# Altium PCB PCB.PcbDoc
Units mil, origin at the board's own origin, x right, y up, seen from the top; angles counter-clockwise.
Board outline 1500.03 x 1150.03 mil, 2 copper layers (Top Layer, Bottom Layer); 57 components, 37 nets, 196 pads, 38 vias.
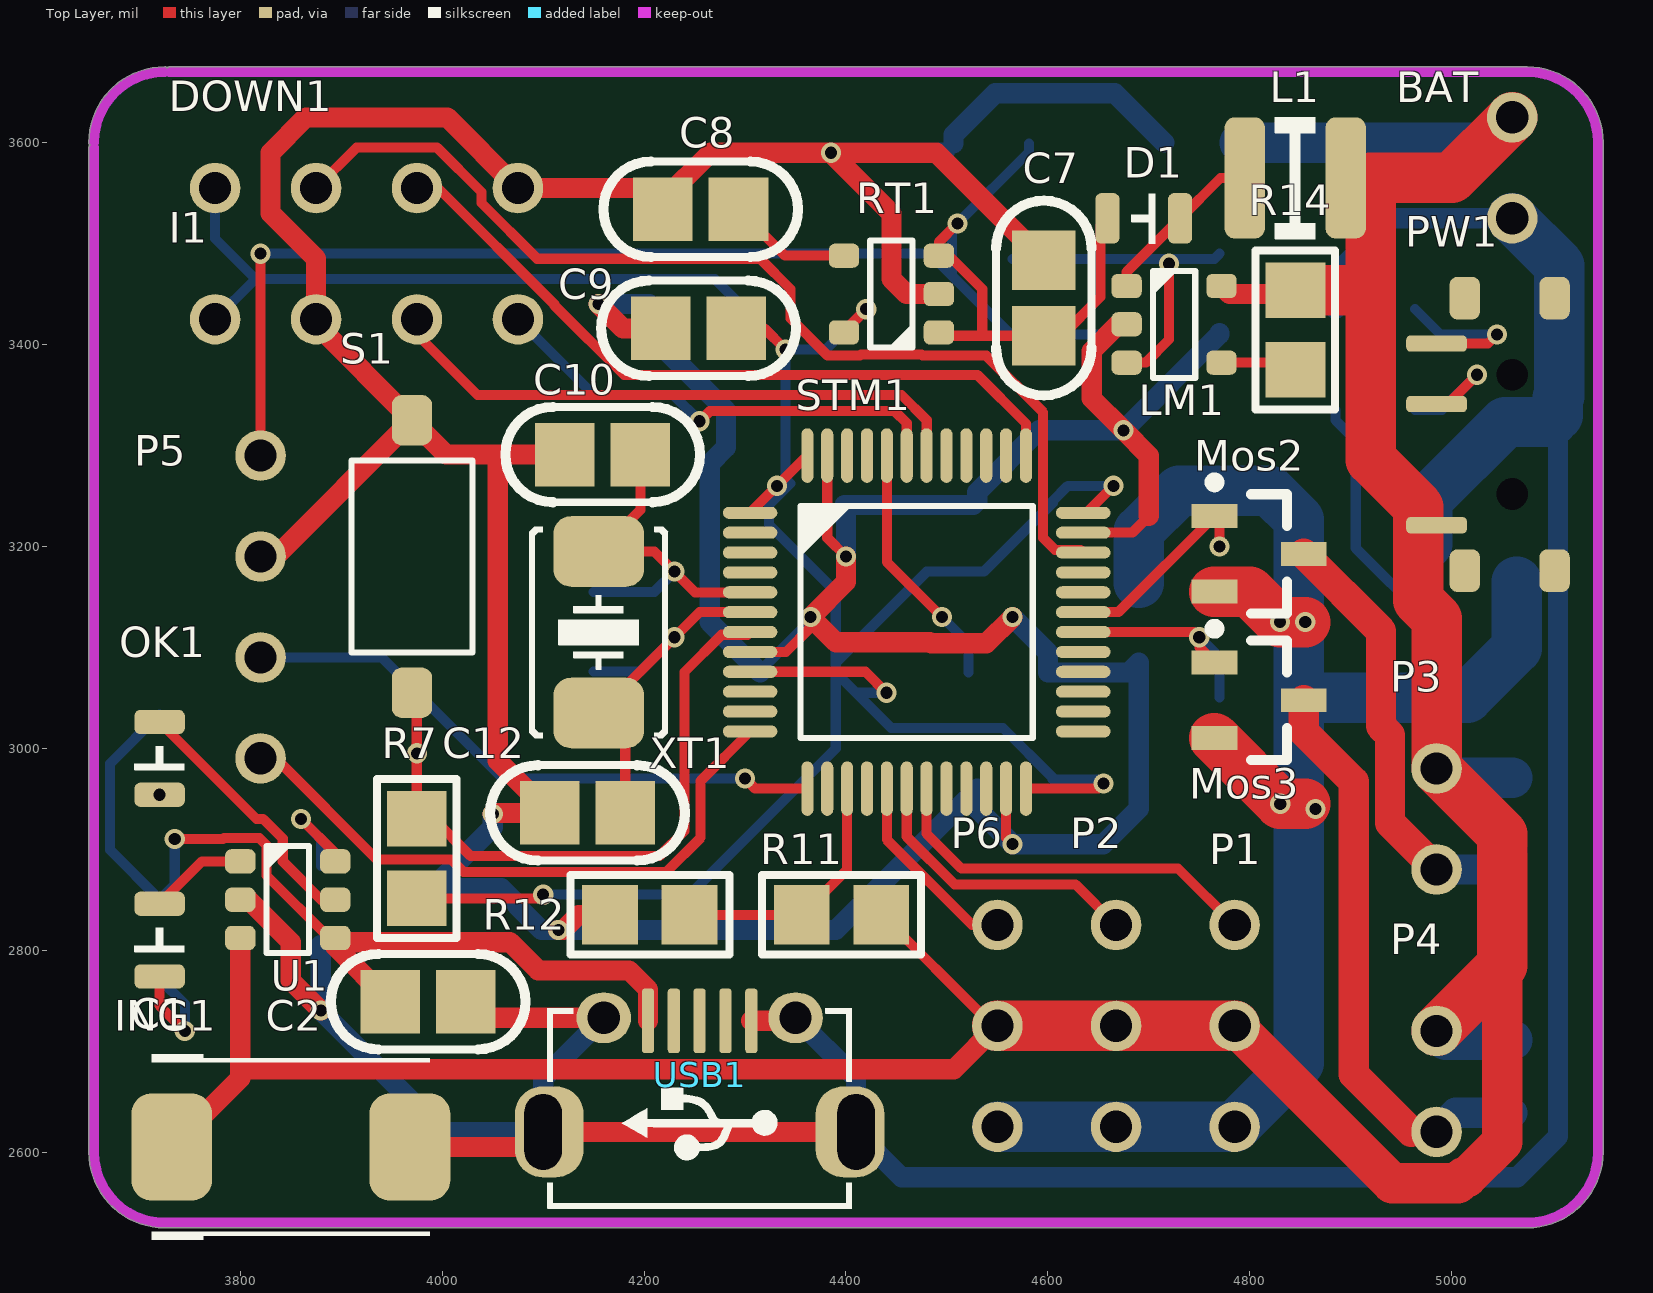
[diagram p0: Top Layer view]
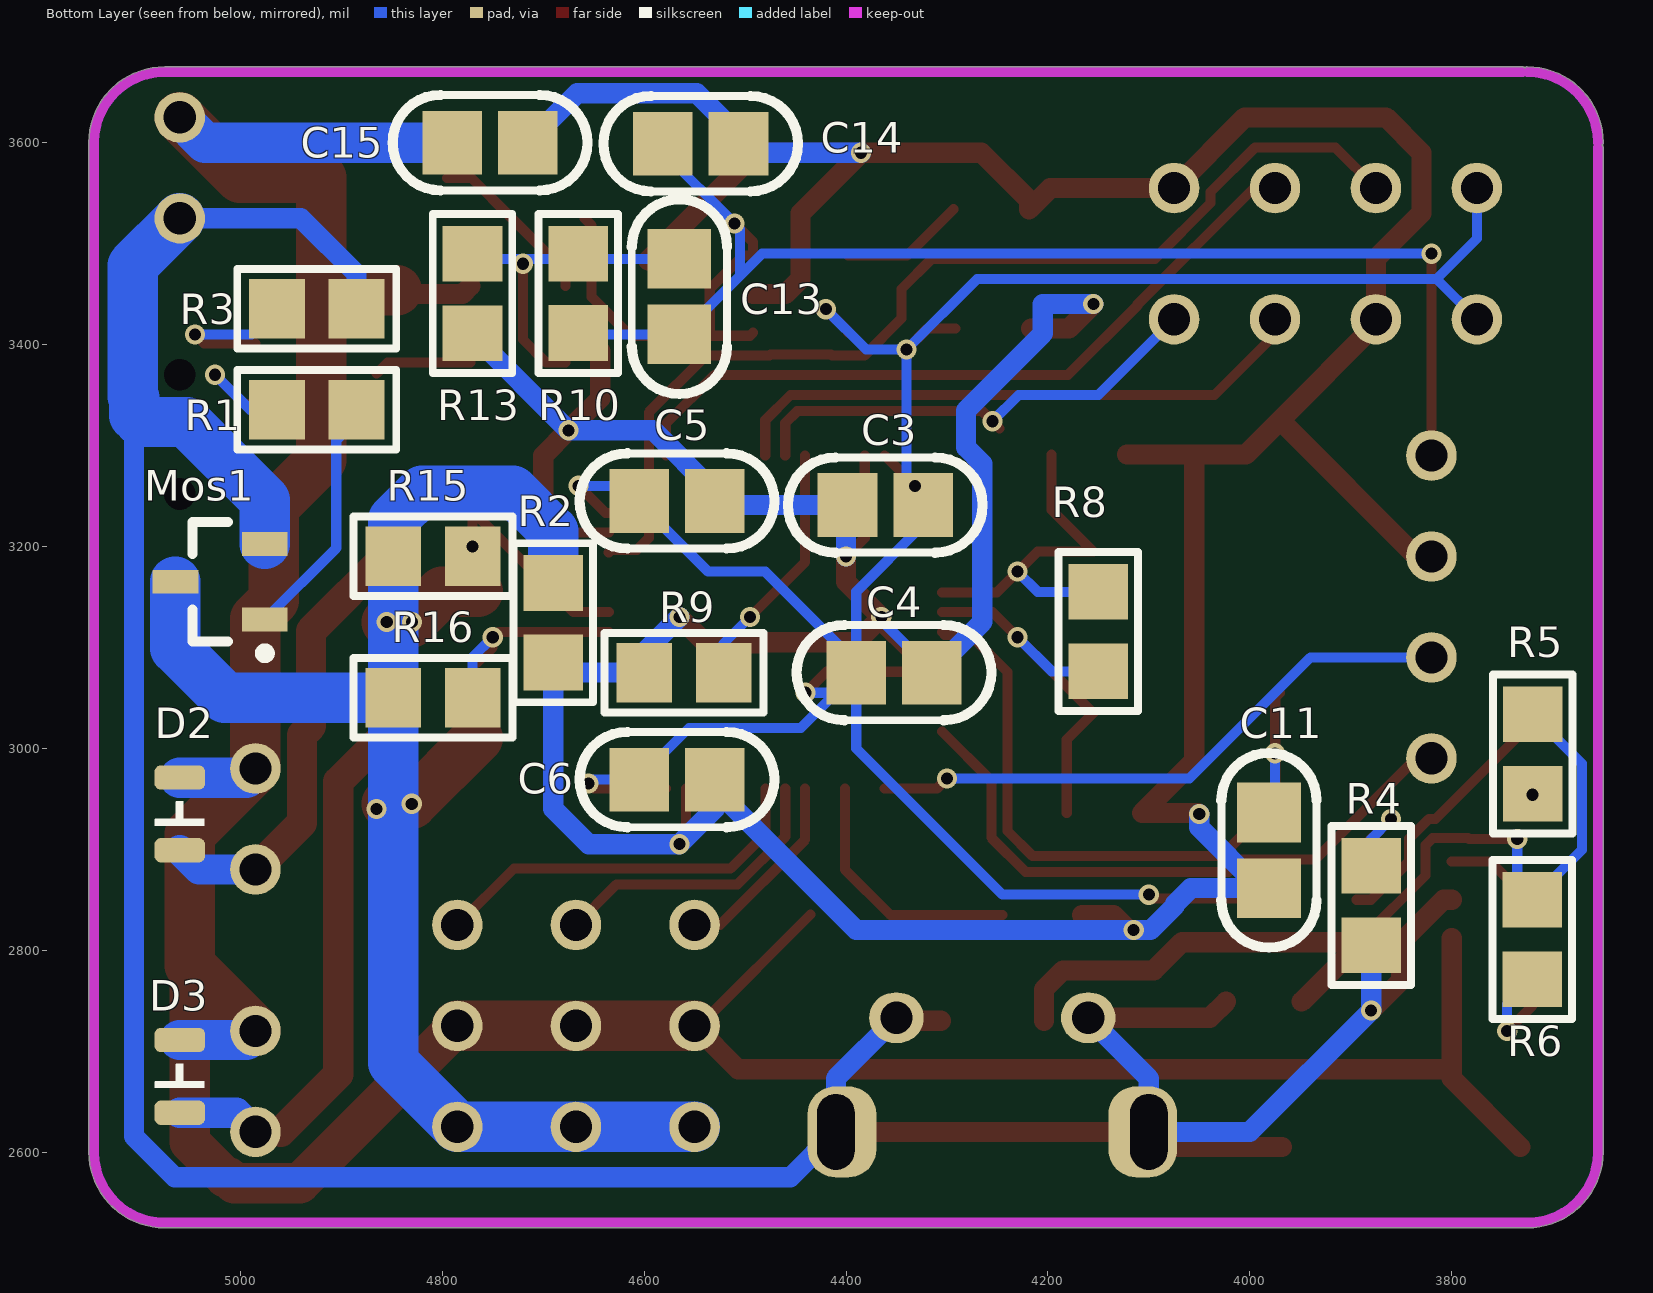
[diagram p1: Bottom Layer view, seen from below]
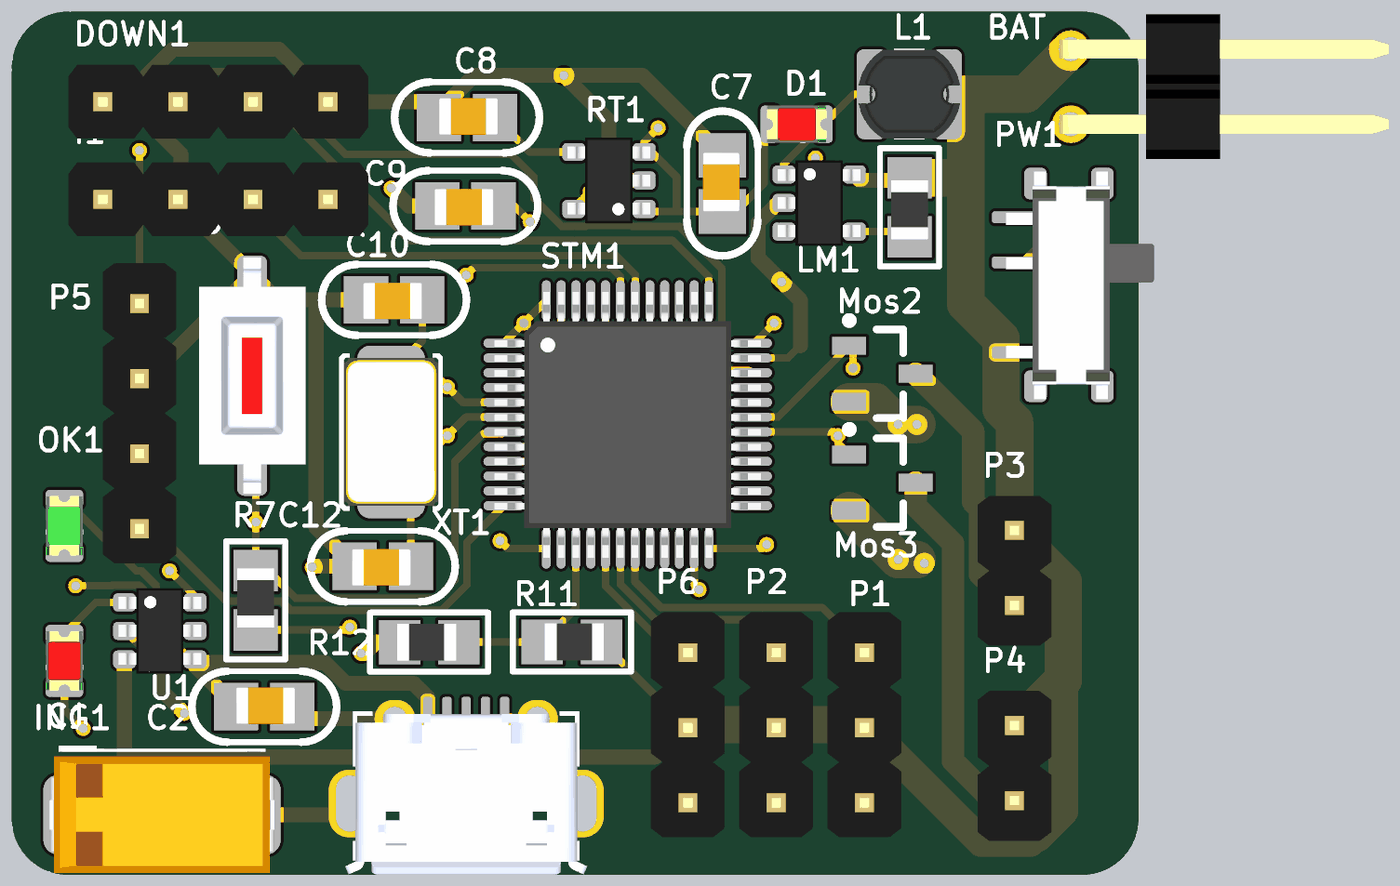
[diagram p2: 3D render of the assembled board from above, using the file's embedded part models]
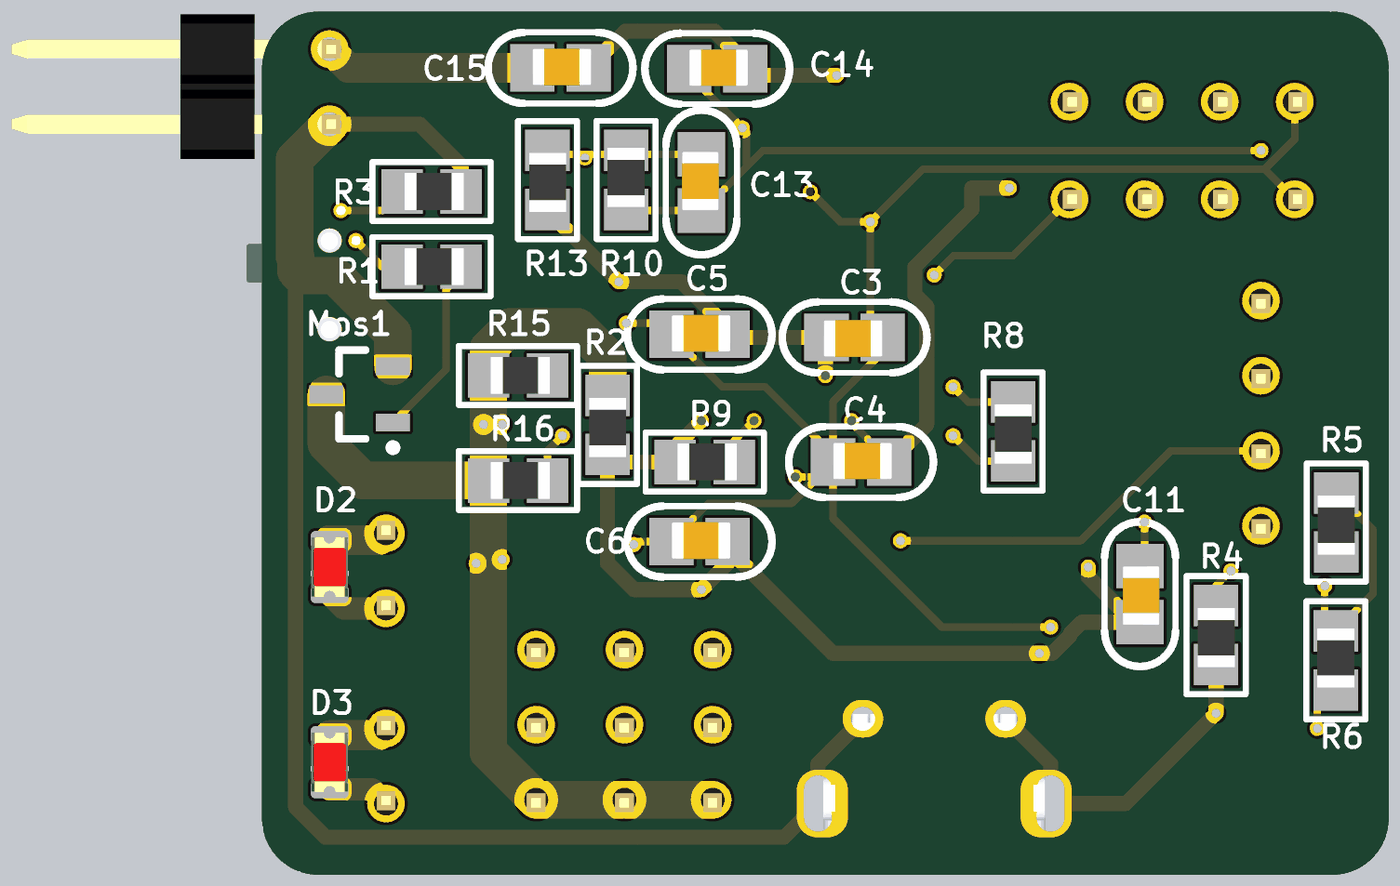
[diagram p3: 3D render of the assembled board from below, using the file's embedded part models]

## Layer stack, top to bottom
Top Layer: signal copper 1.4
Dielectric: dielectric 12.6, FR-4, Dk 4.8
Bottom Layer: signal copper 1.4

## Board outline
3649.99,2600 3649.99,3595 cw(c3655,3595) 3650.65,3597.5 cw(c3655,3600) 3649.99,3600 cw(c3725,3600) 3725,3675.01 cw(c3725,3670) 3727.5,3674.35 cw(c3730,3670) 3730,3675.01 5075,3675.01 cw(c5075,3600) 5150.02,3600 5150.02,2600 cw(c5075,2600) 5075,2524.99 3725,2524.99 cw(c3725,2600)

## Design rules (kind name [scope] priority, off if disabled: settings)
Clearance [All] p1: gap=6
PolygonConnect [All] p1: connectstyle=Relief reliefconductorwidth=10 reliefentries=4 polygonreliefangle="90 Angle" airgapwidth=10
RoutingVias [All] p1: holewidth=28 width=50 viastyle="Through Hole" minholewidth=28 minwidth=50 maxholewidth=28 maxwidth=50
SolderMaskExpansion [All] p1: expansion=4
Width [All] p1: maxlimit=80 minlimit=10 preferedwidth=10 minimp=50.000000 maximp=50.000000 favimp=50.000000
28 further rules are at their usual default settings.

## Components (designator, comment, footprint, x,y, rotation, side; value= is the part's Value field where it differs from the comment)
BAT "HDR1x2_2.54" HDR1X2_2.54_90 5060,3625 r0 top
C1 "Cap_Tan_2917" CAP_TAN_D2917 3850,2605 r0 top
C2 "Cap_0805" CAP_0805 3985,2750 r180 top
C3 "Cap_0805" CAP_0805 4360,3240 r180 bottom
C4 "Cap_0805" CAP_0805 4353.46,3075.99 r0 bottom
C5 "Cap_0805" CAP_0805 4568.46,3245.99 r0 bottom
C6 "Cap_0805" CAP_0805 4568.46,2970 r0 bottom
C7 "Cap_0805" CAP_0805 4595,3445 r270 top
C8 "Cap_0805" CAP_0805 4255,3535 r180 top
C9 "Cap_0805" CAP_0805 4255,3415 r0 top
C10 "Cap_0805" CAP_0805 4160,3290 r0 top
C11 "Cap_0805" CAP_0805 3980,2900 r90 bottom
C12 "Cap_0805" CAP_0805 4145,2935 r0 top
C13 "Cap_0805" CAP_0805 4565.99,3446.34 r270 bottom
C14 "Cap_0805" CAP_0805 4545,3600 r0 bottom
C15 "Cap_0805" CAP_0805 4753.66,3600.99 r0 bottom
D1 "Diode" LED_0805_RED 4695,3525 r180 top
D2 "LED_0805" LED_0805_RED 5060,2935 r90 bottom
D3 "LED_0805" LED_0805_RED 5060,2675 r90 bottom
DOWN1 "HDR1x4_2.54" HDR1x4_2.54_180 3775,3555 r90 top
I1 "HDR1x4_2.54" HDR1x4_2.54_180 3775,3425 r90 top
ING1 "LED_0805" LED_0805_RED 3720,2810 r90 top
L1 "Ind_CD32" IND_CD32 4845,3565 r180 top
LM1 "LM27313" SOT23-5 4725,3420 r0 top
Mos1 "MOSFET N" Nmos_SOT23 5020,3165 r0 bottom
Mos2 "MOSFET N" Nmos_SOT23 4809.29,3192.6 r0 top
Mos3 "MOSFET N" Nmos_SOT23 4809.29,3047.6 r0 top
OK1 "LED_0805" LED_0805_GREEN 3720,2990 r90 top
P1 "HDR1x3_2.54" HDR1X3_2.54_180 4785,2825 r0 top
P2 "HDR1x3_2.54" HDR1X3_2.54_180 4667.5,2825 r0 top
P3 "HDR1x2_2.54" HDR1X2_2.54_180 4985,2980 r0 top
P4 "HDR1x2_2.54" HDR1X2_2.54_180 4985,2720 r0 top
P5 "HDR1x4_2.54" HDR1x4_2.54_180 3820,2990 r180 top
P6 "HDR1x3_2.54" HDR1X3_2.54_180 4550,2825 r0 top
PW1 "SwitchSPDT_2.8x6.6_90" SwitchSPDT_2.8X6.6_90 5060,3310.94 r90 top
R1 "Res_0805" RES_0805 4925,3335 r0 bottom
R2 "Res_0805" RES_0805 4690.25,3125.08 r90 bottom
R3 "Res_0805" RES_0805 4925,3435 r0 bottom
R4 "Res_0805" RES_0805 3880,2845 r90 bottom
R5 "Res_0805" RES_0805 3720,2995 r90 bottom
R6 "Res_0805" RES_0805 3720,2810 r270 bottom
R7 "Res_0805" RES_0805 3975,2890 r270 top
R8 "Res_0805" RES_0805 4150.25,3116.34 r90 bottom
R9 "Res_0805" RES_0805 4561.34,3074.75 r0 bottom
R10 "Res_0805" RES_0805 4665,3450 r270 bottom
R11 "Res_0805" RES_0805 4395,2835 r180 top
R12 "Res_0805" RES_0805 4206.34,2835.25 r0 top
R13 "Res_0805" RES_0805 4770.25,3451.34 r90 bottom
R14 "Res_0805" RES_0805 4845,3415 r90 top
R15 "Res_0805" RES_0805 4810,3190 r0 bottom
R16 "Res_0805" RES_0805 4810,3050 r0 bottom
RT1 "RT9193" SOT23-5 4445,3450 r180 top
S1 "ButtonTACT_3x6x2.5_180" ButtonTACT_3x6x2.5_180 3970,3190 r90 top
STM1 "STM32F103C" LQFP_P0.5_48 4470,3125 r0 top locked
U1 "TP4059" SOT23-6 3847,2850 r0 top
USB1 "USB_Micro" USB_Micro-AB 4255,2630 r180 top
XT1 "XTAL_5032_2P" XT_5032_2 4155,3115 r90 top

## Footprints (in the part's own frame and the unit in brackets; to place one, negate y for a bottom-side part, rotate by r counter-clockwise, add the part's x,y. Pads: shape width x height; smd on the part's side, far side on the other; paste and mask are expansions set on the pad)
ButtonTACT_3x6x2.5_180 [mil]
  rrect50% 50x40 smd: 1(-135,0) 2(135,0)
  silkscreen extent -95,-60 95,60, body extent -157,-71 157,71, height 94
CAP_0805 [mm]
  rect 1.5x1.6 smd: 1(-0.977,0.025) 2(0.923,0.025)
  silkscreen extent -2.48,-1.17 2.42,1.23, body extent -1.08,-0.64 0.92,0.62, height 1
CAP_TAN_D2917 [mil]
  rrect50% 80x106 smd: 1(-118,0) 2(118,0)
  silkscreen extent -138,-92 138,92, body extent -150,-78 150,78, height 122
HDR1X2_2.54_90 [mil]
  round 50 hole 32: 1(0,0) 2(0,-100)
  body extent -15,-146 424,46, height 99
HDR1X2_2.54_180 [mil]
  round 50 hole 32: 1(0,0) 2(0,-100)
  body extent -49,-150 49,50, height 323
HDR1X3_2.54_180 [mil]
  round 50 hole 32: 1(0,0) 2(0,-100) 3(0,-200)
  body extent -49,-250 49,50, height 323
HDR1x4_2.54_180 [mil]
  round 50 hole 32: 1(0,0) 2(0,-100) 3(0,-200) 4(0,-300)
  body extent -49,-350 49,50, height 323
IND_CD32 [mil]
  rrect50% 40x120 smd: 1(-50,0) 2(50,0)
  silkscreen extent -20,-60 20,60, body extent -68,-59 68,59, height 83
LED_0805_GREEN [mil]
  rrect50% 24x50 smd: 1(-36,0) 2(36,0)
  silkscreen extent -12,-24 12,24, body extent -40,-25 40,25, height 43
LED_0805_RED [mil]
  rrect50% 24x50 smd: 1(-36,0) 2(36,0)
  silkscreen extent -12,-24 12,24, body extent -40,-25 40,25, height 43
LQFP_P0.5_48 [mil]
  oval 54x12 smd: 1(-165,108.27) 2(-165,88.58) 3(-165,68.9) 4(-165,49.21) 5(-165,29.53) 6(-165,9.84) 7(-165,-9.84) 8(-165,-29.53) 9(-165,-49.21) 10(-165,-68.9) 11(-165,-88.58) 12(-165,-108.27) 25(165,-108.27) 26(165,-88.58) 27(165,-68.9) 28(165,-49.21) 29(165,-29.53) 30(165,-9.84) 31(165,9.84) 32(165,29.53) 33(165,49.21) 34(165,68.9) 35(165,88.58) 36(165,108.27)
  oval 12x54 smd: 13(-108.27,-165) 14(-88.58,-165) 15(-68.9,-165) 16(-49.21,-165) 17(-29.53,-165) 18(-9.84,-165) 19(9.84,-165) 20(29.53,-165) 21(49.21,-165) 22(68.9,-165) 23(88.58,-165) 24(108.27,-165) 37(108.27,165) 38(88.58,165) 39(68.9,165) 40(49.21,165) 41(29.53,165) 42(9.84,165) 43(-9.84,165) 44(-29.53,165) 45(-49.21,165) 46(-68.9,165) 47(-88.58,165) 48(-108.27,165)
  silkscreen extent -115,-115 115,115, body extent -177,-178 177,177, height 61
Nmos_SOT23 [mm]
  rect 1.15x0.6 smd: D(1.125,0) G(-1.125,0.95) S(-1.125,-0.95)
  silkscreen extent -1.25,-1.5 0.7,1.92, body extent -0.7,-1.5 0.7,1.5, height 1.14
RES_0805 [mm]
  rect 1.4x1.5 smd: 1(-1.018,-0.006) 2(0.982,-0.006)
  silkscreen extent -2.02,-1.01 1.98,0.99, body extent -1.1,-0.64 0.9,0.62, height 0.6
SOT23-5 [mil]
  rrect50% 30x24 smd: 1(-47,38) 2(-47,0) 3(-47,-38) 4(47,-38) 5(47,38)
  silkscreen extent -21,-53 21,53, body extent -55,-57 55,57, height 57
SOT23-6 [mil]
  rrect50% 30x24 smd: 1(-47,38) 2(-47,0) 3(-47,-38) 4(47,-38) 5(47,0) 6(47,38)
  silkscreen extent -21,-53 21,53, body extent -55,-57 55,57, height 57
SwitchSPDT_2.8X6.6_90 [mil]
  rrect50% 42x30 smd: 0(-135,-42) 0(-135,47) 0(135,-42) 0(135,47)
  round 10 hole 31.5: 0(-59.06,0) 0(59.06,0)
  rrect50% 16x60 smd: 1(90,75) 2(30,75) 3(-90,75)
  body extent -152,-111 151,86, height 55
USB_Micro-AB [mil]
  rrect80% 68x90 hole 37 slot 75 at 90 deg copper offset 6,0 mask+0: 0(-155,10)
  oval 54x50 hole 32 mask+0: 0(-95,-103) 0(95,-103)
  rrect80% 68x90 hole 37 slot 75 at 90 deg copper offset -6,0 mask+0: 0(155,10)
  rrect50% 12x64 smd: 1(51.18,-100) 2(25.59,-100) 3(0,-100) 4(-25.59,-100) 5(-51.18,-100)
  silkscreen extent -150,-113 150,86, body extent -161,-109 161,104, height 108
XT_5032_2 [mil]
  rrect50% 70x90 smd: 1(-80,0) 2(80,0)
  silkscreen extent -104,-68 104,68, body extent -98,-63 98,63, height 39

## Part data
BAT DOWN1 I1 P1 P2 P5 P6: "Header"
C1 C2 C3 C4 C5 C6 C7 C8 C9 C10 C11 C12 C13 C14 C15: "Capacitor"
D2 D3 ING1 OK1: "LED"
L1: "Inductor"
Mos1 Mos2 Mos3: "MOS SOT23"
P3 P4: library part HDR1x2_2.54T, "Header"
PW1: "Switch"
R1 R2 R3 R4 R5 R6 R7 R8 R9 R10 R11 R12 R13 R14 R15 R16: "Resistor"
RT1: "Power"
S1: "Button"
STM1: "MCU"
USB1: "USB"
XT1: "Crystal Oscillator"

## Via types
v1: diameter 20, hole 12, Top Layer to Bottom Layer, 38 vias

## Nets (pads, with @x,y where several pads share a name; then routed paths per layer and width w, separated by ;. In a path a pad name is that pad's centre, name@x,y a point inside that pad or via, vN(x,y) a via of type N, cw(c..) or ccw(c..) an arc to the next point about the centre after c; other vN are vias at no path point)
3V3: C3.2 C4.2 C5.2 C6.2 C9.2 DOWN1.1 I1.1 R7.2 RT1.5 STM1.1 STM1.9 STM1.24 STM1.36 STM1.48 | length 2847.7
  Top Layer w10: R7.2 4096.34,2851.34 v1(4100,2855) ; C9.2 4319.01,3415.99 v1(4340,3395) ; STM1.9 4419.21,3075.79 v1(4440,3055) ; STM1.1 v1(4331.73,3260) STM1.48 ; RT1.5 4398,3413 v1(4420,3435) ; STM1.24 4650,2960 v1(4655,2965) ; STM1.36 4638.27,3233.27 v1(4665,3260)
  Bottom Layer w10: I1.1 3815,3465 ; DOWN1.1 3775,3505 3815,3465 ; v1(4100,2855) 4245,2855 4389.8,2999.8 C4.2 ; C4.2@4389.8,3084.8 4480,3175 4536.58,3175 4604.8,3243.22 C5.2 4619.8,3260 v1(4665,3260) ; v1(4420,3435) 4380,3395 v1(4340,3395) ; v1(4440,3055) C4.2@4409.8,3055 ; v1(4655,2965) 4650.99,2969.01 C6.2 4604.8,2970.79 4555.59,3020 4444.8,3020 C4.2@4409.8,3055 ; 3815,3465 4270,3465 v1(4340,3395) ; v1(4340,3395) 4340,3267.33 4345,3262.33 C3.2 4323.66,3221.34 4389.8,3155.2 C4.2 ; C4.2 C4.2@4409.8,3055
5V: C7.2 C13.2 C14.2 D1.2 P5.4 R10.2 RT1.1 RT1.3 | length 1642.2
  Top Layer w10: P5.4 3820,3465 v1(3820,3490) ; RT1.1 4495.34,3408.66 4535,3408.66 ; v1(4510.55,3520) 4492,3501.45 RT1.3 4502,3488 4535,3455 4535,3408.66 ; D1.2 4652,3518 4652,3447 4613.66,3408.66 C7.2 4535,3408.66
  Bottom Layer w10: v1(3820,3490) 4483.22,3490 4505,3468.22 ; C14.2 4581.34,3590.79 v1(4510.55,3520) 4505,3514.45 4505,3468.22 ; R10.2 4663.91,3410 C13.2 4563.22,3410 4505,3468.22
ADC: R11.2 R12.2 STM1.15 | length 254.7
  Top Layer w10: R12.2 4356.09,2835 R11.2 4401.1,2880.01 STM1.15
BGND: BAT.2 C1.2 C2.1 Mos1.S R3.1 R4.1 U1.2 USB1.0 USB1.5 | length 3491.1
  Top Layer w20: U1.2 3808.11,2850 3850,2808.11 3850,2770 v1(3879.75,2740.25) ; C1.2 4085,2605 4100,2620 USB1.0@4410,2620 ; C2.1 4039.47,2733 USB1.0@4160,2733 ; USB1.5 4347,2730 USB1.0@4350,2733
  Bottom Layer w20: R4.1 v1(3879.75,2740.25) 4000,2620 4100,2620 4100,2673 USB1.0@4160,2733 ; USB1.0@4350,2733 4410,2673 4410,2620 4455,2575 5065,2575 5105.29,2615.29 5105.29,3316.21 5098.25,3323.25 ; R3.1 4884.92,3469.92 4940,3525 BAT.2
  Bottom Layer w50: Mos1.S 4975.71,3245.71 5053.25,3323.25 5098.25,3323.25 5105,3330 5105,3347.14 5106.75,3348.89 5106.75,3478.25 BAT.2
CH2: Mos3.G R16.1 STM1.30 | length 216.4
  Top Layer w10: STM1.30 4744.84,3115.16 v1(4750,3110) 4750,3100 Mos3.G
  Bottom Layer w10: v1(4750,3110) 4769.92,3090.08 R16.1
CH3: Mos2.G R15.1 STM1.31 | length 201.5
  Top Layer w10: STM1.31 4669.84,3134.84 Mos2.G 4770,3225 v1(4770,3200)
GND: C3.1 C4.1 C5.1 C6.1 C7.1 C8.2 C9.1 C10.1 C11.1 C12.1 C14.1 C15.1 DOWN1.4 I1.2 LM1.2 P5.3 R2.1 R9.2 R12.1 R13.1 RT1.2 S1.2 STM1.8 STM1.23 STM1.35 STM1.47 | length 5854.4
  Top Layer w10: STM1.8 4340.47,3095.47 4365,3120 v1(4365,3130) ; STM1.47 4381.42,3208.58 v1(4400,3190) ; STM1.23 4558.58,2911.42 v1(4565,2905) ; STM1.35 4683.58,3213.58 4700,3230
  Top Layer w20: P5.3 3835,3190 S1.2 ; v1(4050,2935) 4050.99,2935.99 C12.1 4055,2987.53 4055,3290.99 ; v1(4115,2820) 4120,2820 4135,2835 R12.1 ; C10.1 4055,3290.99 ; v1(4155,3440) 4179.01,3415.99 C9.1 ; v1(4400,3190) 4400,3165 v1(4365,3130) 4390,3105 4483.23,3105 4484.23,3104 4539,3104 v1(4565,3130) ; RT1.2 4460,3450 4445,3465 4445,3530 v1(4385,3590) ; C7.1 4489.45,3590 v1(4385,3590) ; LM1.2 4669.89,3420 4643.48,3393.6 4643.48,3346.52 v1(4675,3315) 4700,3290 4700,3230 ; S1.2 3875,3420 I1.2 3875,3485 3830,3530 3830,3590 3865,3625 4005,3625 DOWN1.4 4197.67,3555 C8.2 4218.66,3542.86 4265.8,3590 v1(4385,3590) ; S1.2 4004.01,3290.99 4055,3290.99
  Bottom Layer w10: C4.1 4315,3076.78 4365,3126.78 v1(4365,3130)
  Bottom Layer w20: C11.1 C11.1@3989.84,2861.54 ; v1(4050,2935) 4050,2921.7 C11.1@3989.84,2861.54 ; v1(4155,3440) 4205,3440 4205,3410.77 4281,3334.77 4281,3298 4265,3282 4265,3125 C4.1 ; v1(4385,3590) C14.1@4497.53,3590 ; v1(4400,3190) 4400,3239.45 C3.1 4525.99,3240.99 C5.1 4530,3253.85 4591.15,3315 v1(4675,3315) 4770,3410 R13.1 ; C14.1 4506.54,3607.86 4547.68,3649 4666.2,3649 C15.1 ; v1(4565,3130) 4600,3095 R9.2 4680,3075 R2.1 4690,2940 4655,2905 v1(4565,2905) 4530,2940 4530,2960.16 4389.84,2820 v1(4115,2820) 4098.23,2820 4074,2844.23 4074,2846 4058.46,2861.54 C11.1@3989.84,2861.54
NetC8_1: C8.1 RT1.4 | length 123.6
  Top Layer w10: C8.1 4339.47,3488 RT1.4
NetC10_2: C10.2 R8.2 STM1.5 XT1.2 | length 368.2
  Top Layer w10: C10.2 4196.34,3236.34 XT1.2 4210,3195 v1(4230,3175) 4250.47,3154.53 STM1.5
  Bottom Layer w10: R8.2 4210,3155 v1(4230,3175)
NetC11_2: C11.2 R7.1 S1.1 STM1.7 | length 717.5
  Top Layer w10: S1.1 3974.75,3050.25 R7.1 3991.28,2930.08 4027.87,2893.49 4215.43,2893.49 4240,2918.06 4240,3075.51 4276.96,3112.47 4302.31,3112.47 STM1.7
  Bottom Layer w10: v1(3975,2995) 3975,2942.33 C11.2
NetC12_2: C12.2 R8.1 STM1.6 XT1.1 | length 395.3
  Top Layer w10: C12.2 4181.34,3008.66 XT1.1 v1(4230,3110) 4254.84,3134.84 STM1.6
  Bottom Layer w10: R8.1 4196.26,3076.26 v1(4230,3110)
NetC13_1: C13.1 LM1.3 R10.1 R13.2 | length 333.7
  Top Layer w10: LM1.3 4697,3382 4720,3405 v1(4720,3480)
  Bottom Layer w10: C13.1 4764.8,3484.8 R13.2
NetD1_1: D1.1 L1.2 LM1.1 | length 169.5
  Top Layer w10: LM1.1 4678,3472 D1.1 4771,3565 L1.2
NetD2_1: D2.1 Mos2.D P3.2 | length 449.9
  Top Layer w30: Mos2.D 4930,3116.18 4930,3022.09 4939,3013.09 4939,2926 P3.2
  Bottom Layer w30: P3.2 5041,2880 D2.1
NetD3_1: D3.1 Mos3.D P4.2 | length 554.5
  Top Layer w30: Mos3.D 4853.58,3016.42 4903,2967 4903,2677 P4.2@4960,2620
  Bottom Layer w30: P4.2 5004,2639 D3.1
NetING1_1: ING1.1 R6.2 | length 125.9
  Top Layer w10: ING1.1 3720,2745 v1(3745,2720)
  Bottom Layer w10: R6.2 3745,2746.58 v1(3745,2720)
NetING1_2: ING1.2 U1.1 | length 97.4
  Top Layer w10: ING1.2 3762,2888 U1.1
NetLM1_4: LM1.4 R14.1 | length 97.4
  Top Layer w10: LM1.4 4854.26,3382 R14.1@4865,3371.26
NetMos1_G: Mos1.G R1.1 | length 245.3
  Bottom Layer w10: R1.1 4884.92,3325.08 4905,3305 4905,3198.31 Mos1.G
NetOK1_1: OK1.1 R5.1
  other v1: 3720,2954
NetPW1_1: PW1.1 R3.2 | length 155.5
  Top Layer w10: PW1.1 5035.94,3400.94 v1(5045,3410)
  Bottom Layer w10: R3.2 4988.91,3410 v1(5045,3410)
NetR4_2: R4.2 U1.6 | length 110.6
  Top Layer w10: v1(3860,2930) 3894,2896 U1.6
  Bottom Layer w10: v1(3860,2930) 3879.75,2910.25 R4.2
NetR9_1: R9.1 STM1.44 | length 248.5
  Top Layer w10: STM1.44 4440.47,3184.53 v1(4495,3130)
  Bottom Layer w10: v1(4495,3130) 4521.26,3103.74 R9.1
PGND: Mos1.D Mos2.S Mos3.S P1.3 P2.3 P6.3 R2.2 R15.2 R16.2 | length 1622.2
  Top Layer w50: Mos3.S v1(4830.2,2945) 4855,2945 ; Mos2.S 4799.8,3155.2 v1(4830,3125) v1(4855,3125)
  Bottom Layer w50: P6.3 P2.3 P1.3 4848.66,2688.66 R16.2 ; R2.2 4690,3215 4730,3255 4820,3255 4848.66,3226.34 R15.2 R16.2 ; Mos1.D 5064.29,3099.29 5015.25,3050.25 R16.2
  other v1: 4865,2940
RX: P5.2 STM1.13 | length 595.6
  Top Layer w10: v1(4300,2970) 4310,2960 STM1.13
  Bottom Layer w10: P5.2 3940,3090 4060,2970 v1(4300,2970)
SCL: I1.3 STM1.42 | length 590.3
  Top Layer w10: I1.3 3975,3410 4035,3350 4455,3350 4480,3325 4480,3290.16 STM1.42
SDA: I1.4 STM1.43 | length 478.1
  Top Layer w10: v1@4248,3317 v1(4255,3324) 4265,3334 4448.37,3334 4460.16,3322.22 STM1.43
  Bottom Layer w10: I1.4 4150,3350 4229,3350 v1(4255,3324)
STDBY: OK1.2 U1.5 | length 260.2
  Top Layer w10: OK1.2 3816,2930 3822.63,2930 3842,2910.63 3842,2888 3880,2850 U1.5
SWCLK: DOWN1.3 STM1.37 | length 732.2
  Top Layer w10: DOWN1.3 3995.91,3555 4111,3439.91 4111,3439 4180,3370 4530,3370 4578.27,3321.73 STM1.37
SWDIO: DOWN1.2 STM1.34 | length 1039.9
  Top Layer w10: DOWN1.2 3915,3595 3995,3595 4039,3551 4039,3540.09 4094.09,3485 4315,3485 4345,3455 4345,3425.96 4381.96,3389 4414.04,3389 4415.04,3390 4474.96,3390 4475.96,3389 4539.06,3389 4595.27,3332.8 4595.27,3208.27 4606.96,3196.58 4632.31,3196.58 STM1.34
TIM3_CH2: P6.1 STM1.17 | length 195
  Top Layer w10: STM1.17 4440.47,2909.53 4525,2825 P6.1
TIM3_CH3: P2.1 STM1.18 | length 291.1
  Top Layer w10: STM1.18 4460.16,2912.47 4507.63,2865 4627.5,2865 P2.1
TIM3_CH4: P1.1 STM1.19 | length 387.2
  Top Layer w10: STM1.19 4479.84,2915.41 4514.25,2881 4729,2881 P1.1
TX: P5.1 STM1.12 | length 622.3
  Top Layer w10: P5.1 3835,2990 3935.1,2889.9 4008.84,2889.9 4021.24,2877.49 4222.06,2877.49 4256,2911.44 4256,2967.73 STM1.12
VBAT: BAT.1 C1.1 C15.2 D2.2 D3.2 L1.1 LM1.5 P1.2 P2.2 P3.1 P4.1 P6.2 PW1.3 R11.1 R14.2 U1.3 | length 3602.6
  Top Layer w10: R11.1 4540.32,2730 P6.2@4545,2730
  Top Layer w20: C1.1 3800,2673 3800,2685 ; U1.3 3800,2685 ; P6.2 4507,2682 3803,2682 3800,2685 ; LM1.5 4780,3450 R14.2@4865,3450
  Top Layer w40: P1.2 4941,2569 5006.12,2569 5012.12,2575 5015,2575 5050,2610 5050,2785
  Top Layer w50: P6.2 P2.2 P1.2 ; R14.2 4916.34,3453.66 4920,3450 ; P4.1 5050,2785 5050,2915 P3.1 4985,3128.5 4967,3146.5 4967,3238.94 4920,3285.94 4920,3450 ; BAT.1 5000,3565 4920,3565 4920,3450
  Bottom Layer w40: C15.2 5035,3600 BAT.1 ; P4.1 4994,2711 D3.2 ; P3.1@4994,2971 D2.2
VIN: PW1.2 R1.2 | length 127.8
  Top Layer w10: PW1.2 4995.94,3340.94 v1(5025,3370)
  Bottom Layer w10: R1.2 4990.25,3335.25 v1(5025,3370)
VUSB: C2.2 R5.2 R6.1 U1.4 USB1.1 | length 954.1
  Top Layer w10: v1(3735,2910) 3782.96,2910 3783.96,2911 3819,2911 3826,2904 3826,2874 3888,2812 U1.4
  Top Layer w20: U1.4 U1.4@3894,2807.78 ; C2.2 3894,2803.67 U1.4@3894,2807.78 ; USB1.1 4203.82,2761.18 4185,2780 4095,2780 4067.22,2807.78 U1.4@3894,2807.78
  Bottom Layer w10: R5.2 3671,2984.91 3671,2899.32 R6.1 3735,2864.83 v1(3735,2910)
pads on no net: PW1.0 STM1.2 STM1.3 STM1.4 STM1.10 STM1.11 STM1.14 STM1.16 STM1.20 STM1.21 STM1.22 STM1.25 STM1.26 STM1.27 STM1.28 STM1.29 STM1.32 STM1.33 STM1.38 STM1.39 STM1.40 STM1.41 STM1.45 STM1.46 USB1.2 USB1.3 USB1.4

## Keep-outs
Keep-Out Layer:
  lines w10: 3655,3595 3655,2600 ccw(c3725,2600) 3725,2530 5075,2530 ccw(c5075,2600) 5145,2600 5145,3600 ccw(c5075,3600) 5075,3670 3730,3670 ; 3655,3600 cw(c3725,3600) 3725,3670